# Altium PCB MB1364.PcbDoc (part 1 of 3)
Units mm, origin at the board's own origin, x right, y up, seen from the top; angles counter-clockwise.
Board outline 70 x 133.34 mm, 4 copper layers (Top Layer, Signal Layer 1, Signal Layer 3, Bottom Layer), stack 1.501 mm thick; 93 components, 195 nets, 473 pads, 282 vias.
Unrouted connection lines stored in the file: 23.
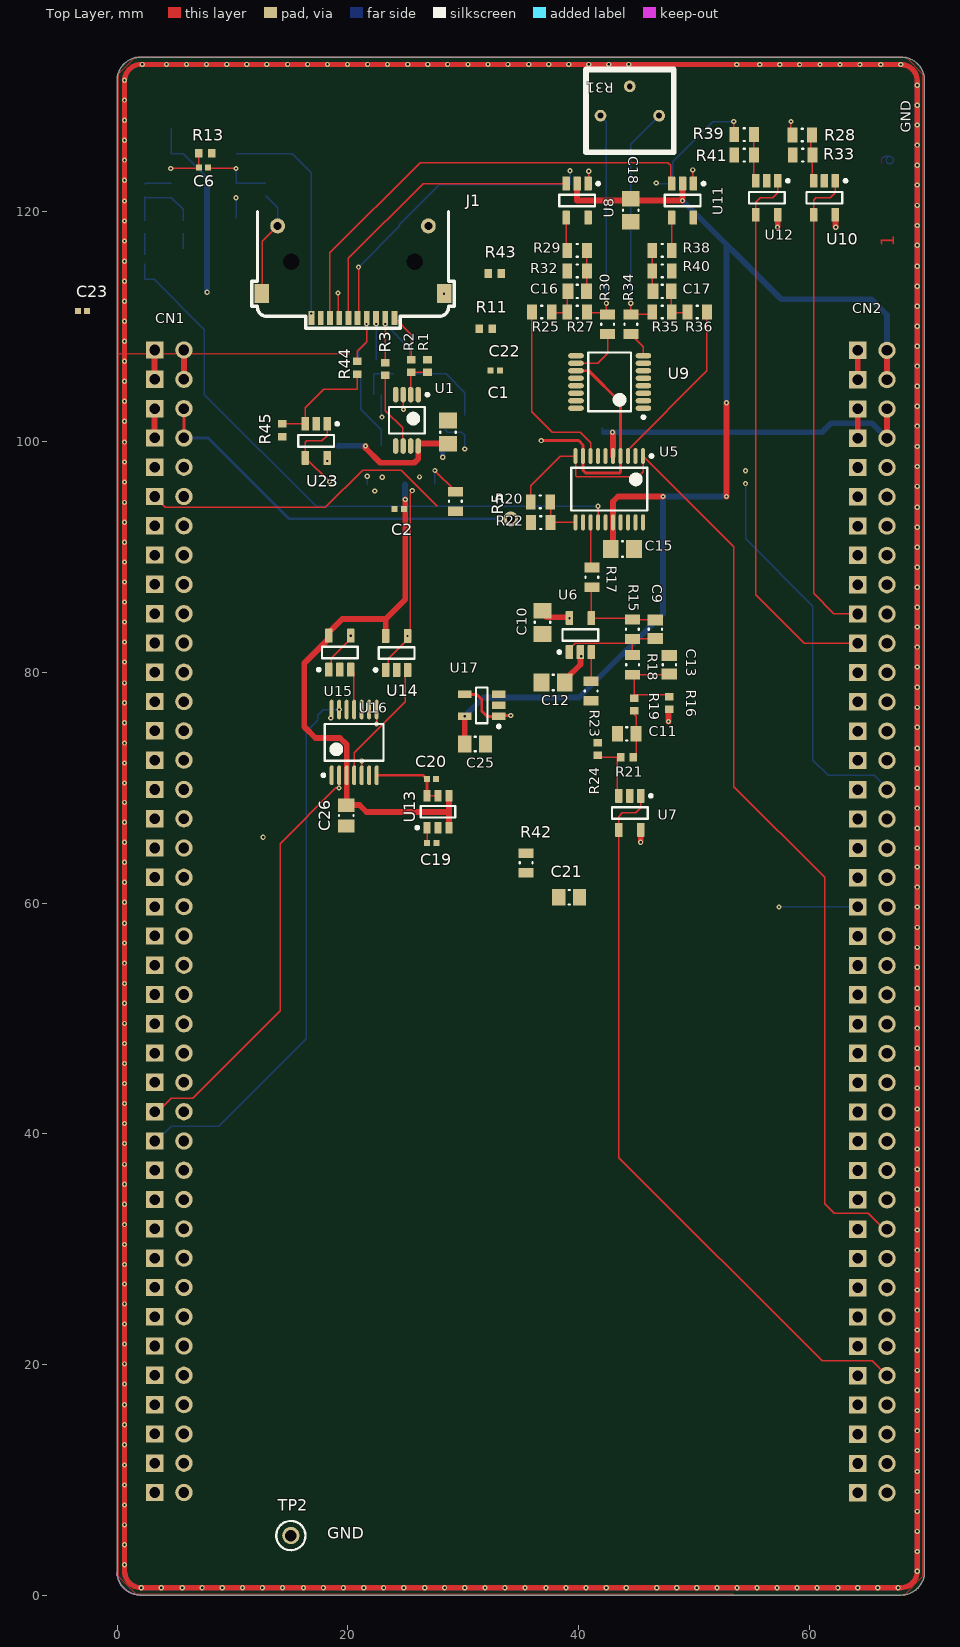
[diagram p0: Top Layer view]
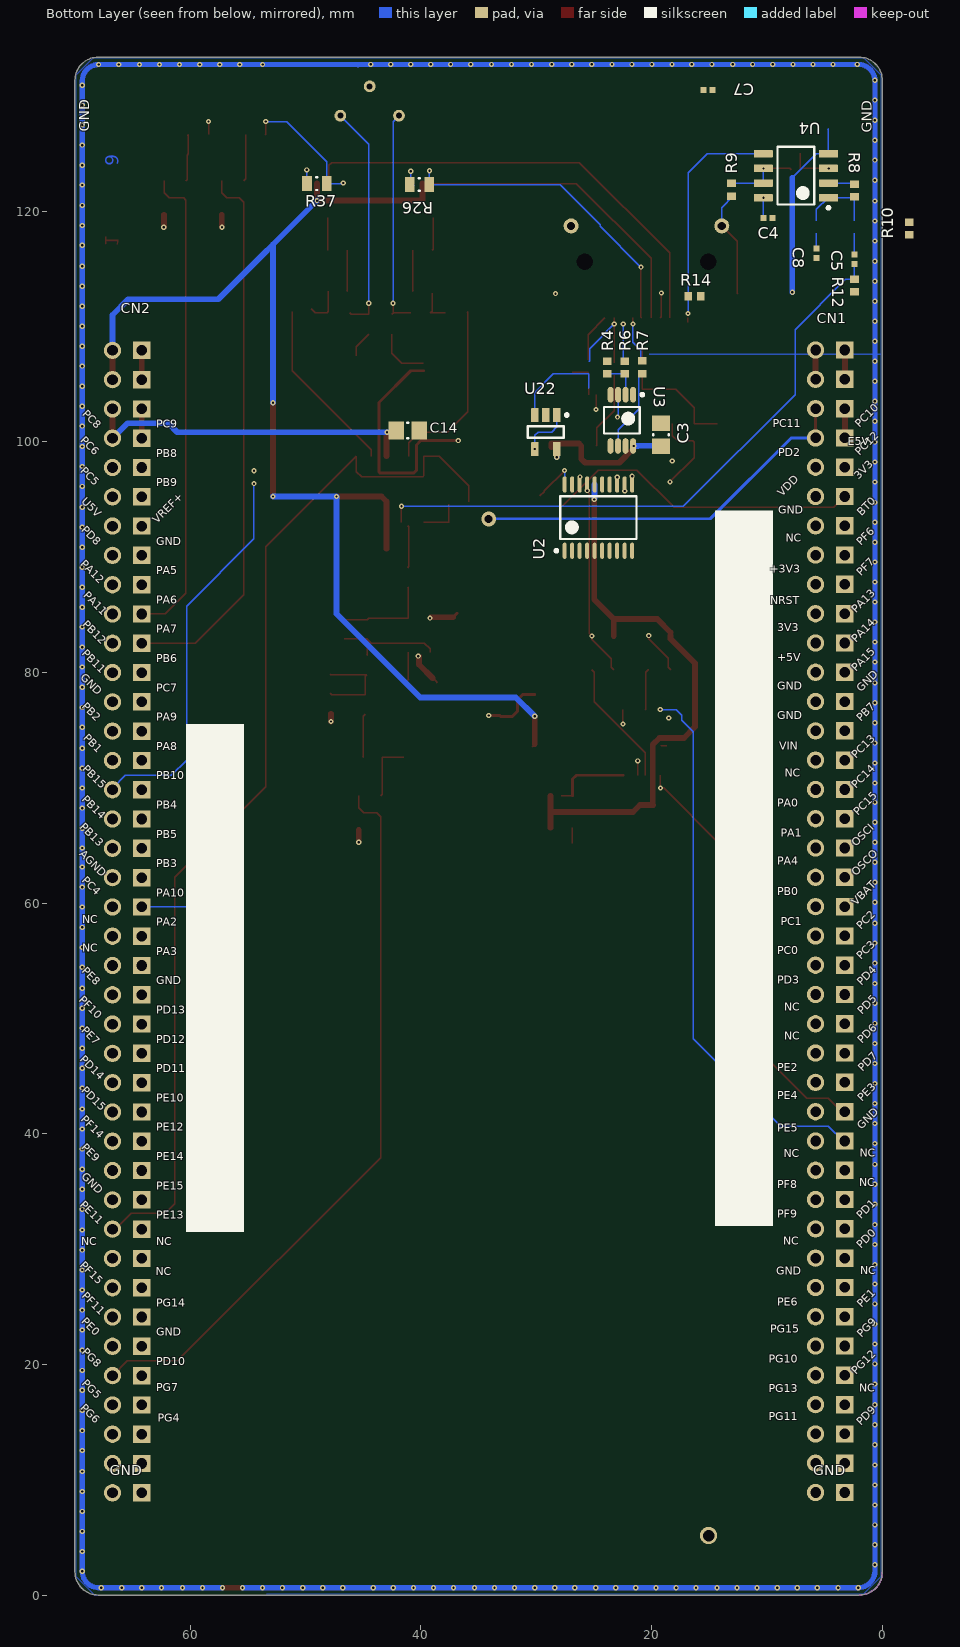
[diagram p1: Bottom Layer view, seen from below]
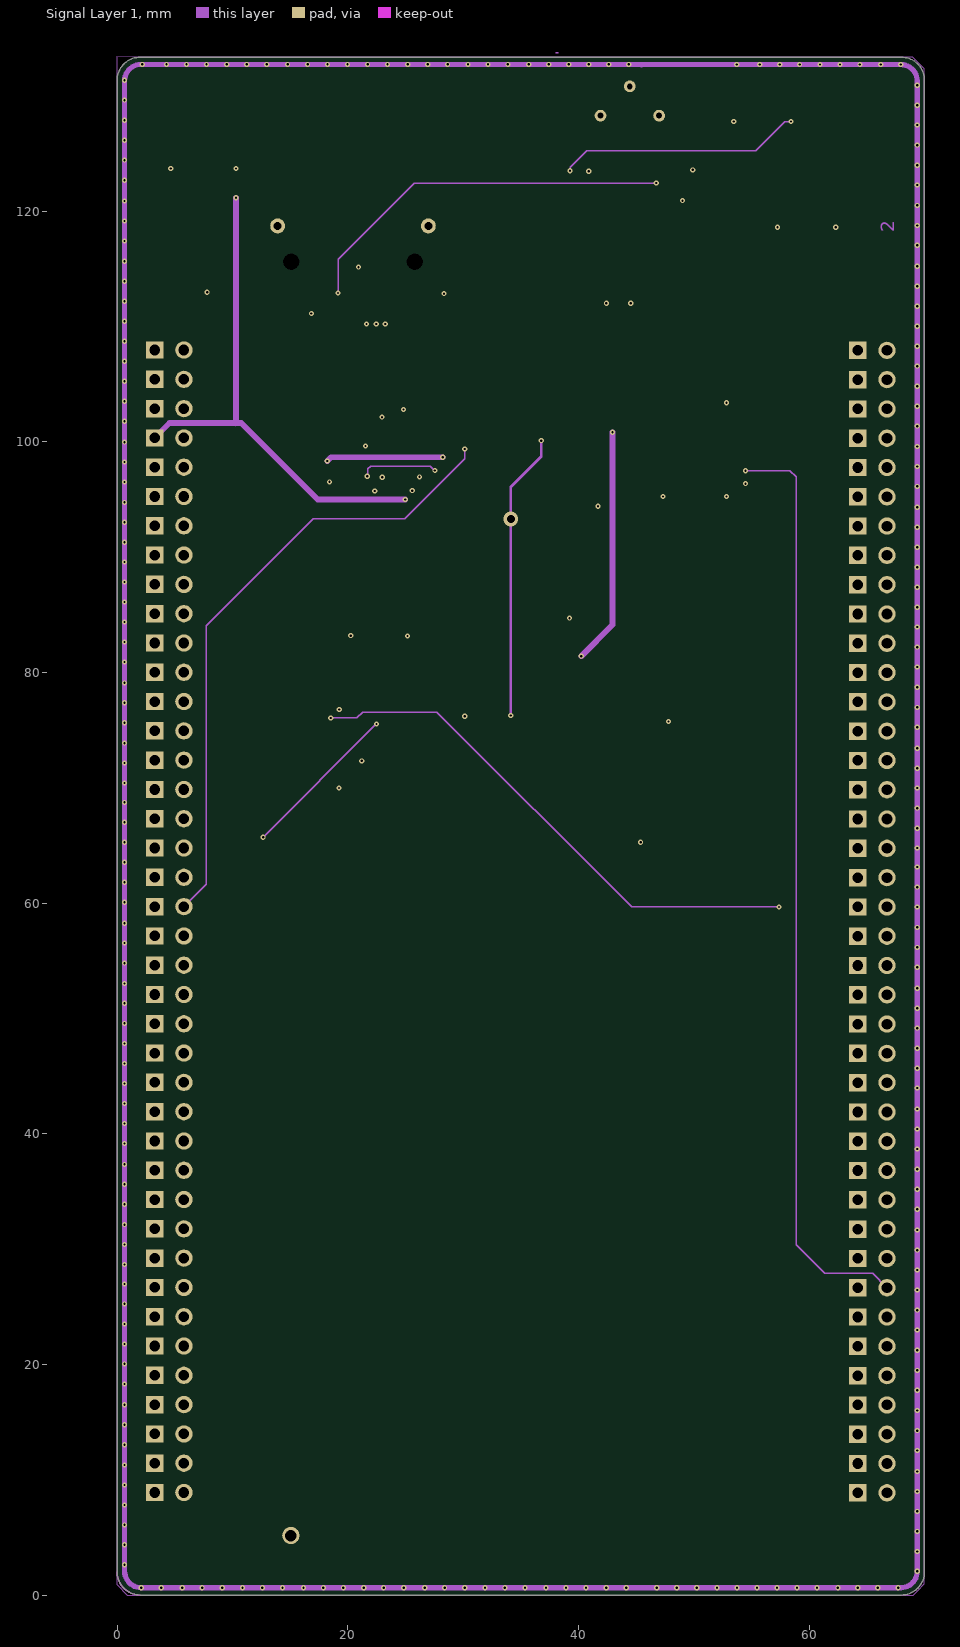
[diagram p2: Signal Layer 1]
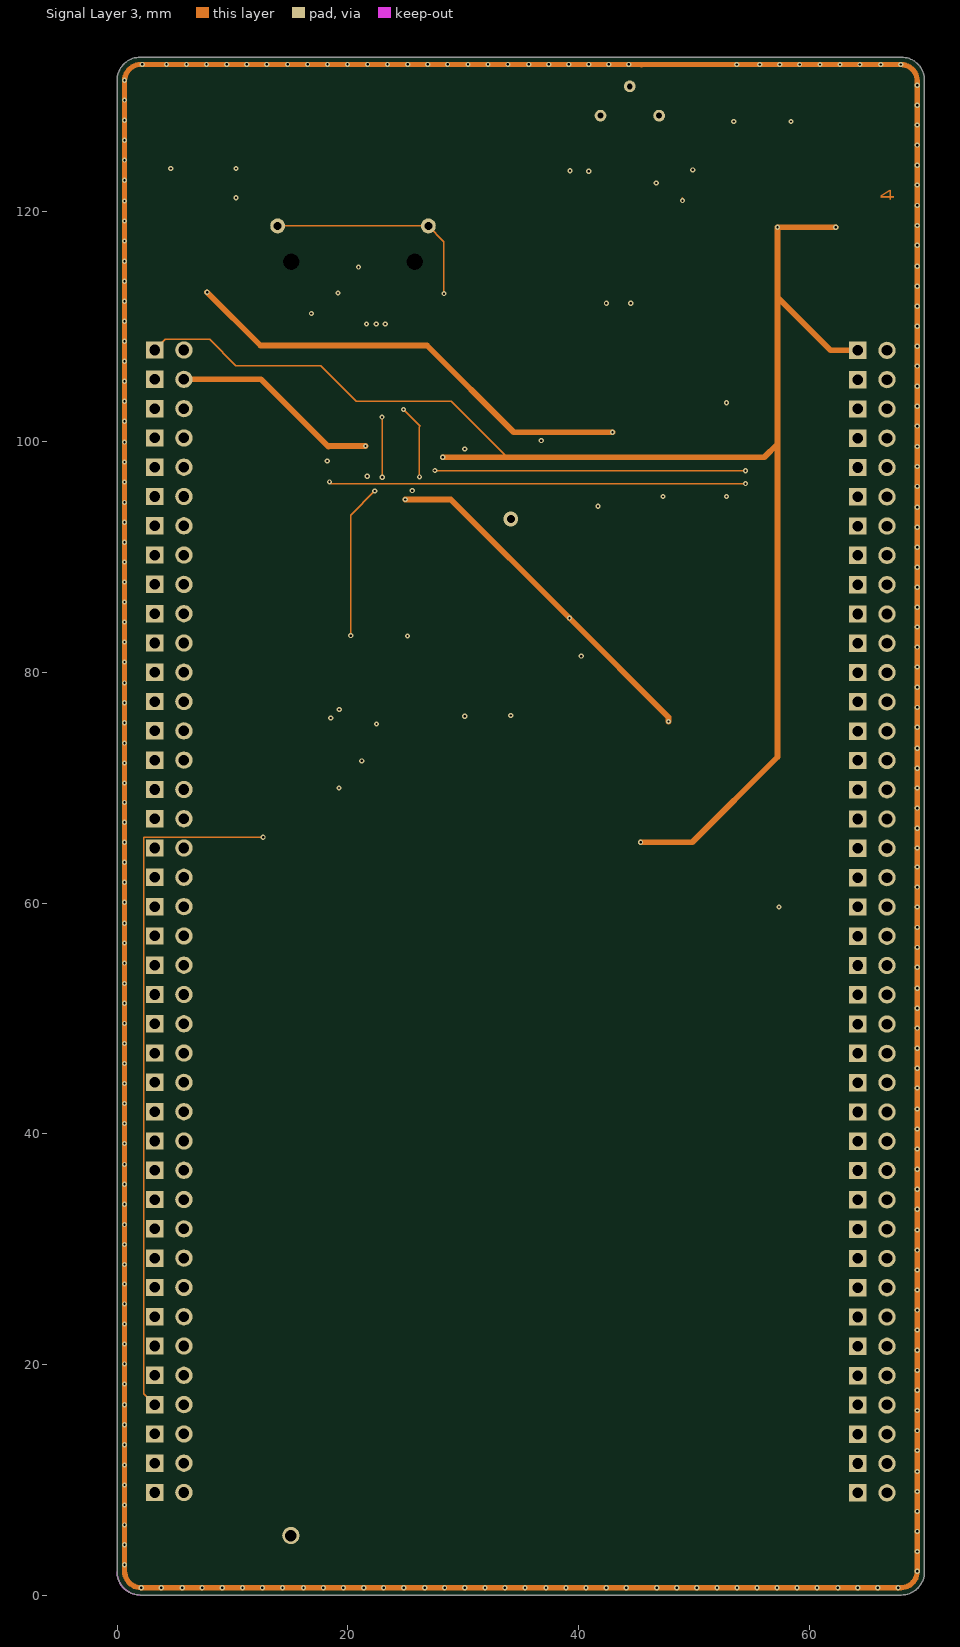
[diagram p3: Signal Layer 3]

## Layer stack, top to bottom
Top Solder: solder mask 0.015, Solder Resist, Dk 3.5
Top Layer: signal copper 0.042
Dielectric 1: prepreg 0.0991, FR-4, Dk 4.2
Signal Layer 1: signal copper 0.0348
Dielectric 2: core 0.1016, Dk 4.2
Dielectric 3: prepreg 0.9457, Dk 4.2
Signal Layer 3: signal copper 0.0348
Dielectric 4: core 0.1016, Dk 4.2
Dielectric 5: prepreg 0.0991, Dk 4.2
Bottom Layer: signal copper 0.042
Bottom Solder: solder mask 0.015, Solder Resist, Dk 3.5

## Board outline
0,2 ccw(c2,2) 2,0 37.369,0 51.369,0 68,0 ccw(c68,2) 70,2 70,131.34 ccw(c68,131.34) 68,133.34 2,133.34 ccw(c2,131.34) 0,131.34

## Design rules (kind name [scope] priority, off if disabled: settings)
BoardOutlineClearance [All] p1: gap=0.4 ignorepadtopadclearanceinfootprint=FALSE
Clearance Clearance_RMII_SINGLE_50R [InNetClass('NC_RMII_SINGLE_50R')] p1: gap=0.12 ignorepadtopadclearanceinfootprint=TRUE except(0.2: Arc-Hole Track-Hole SMDPad-SMDPad SMDPad-THPad SMDPad-Hole THPad-THPad THPad-Hole Via-Via Via-Hole Fill-Hole Poly-Hole Region-Hole Text-Hole; 0.3: Arc-Fill Arc-Poly Track-Track Track-Fill Track-Poly SMDPad-Fill SMDPad-Poly THPad-Fill THPad-Poly Via-Fill Via-Poly Fill-Fill Fill-Poly Poly-Poly)
Clearance Clearance_VCP_ISO300 [InNetClass('NC_VCP_ISO300')] p2: gap=0.12 ignorepadtopadclearanceinfootprint=TRUE except(0.2: Arc-Hole Track-Hole SMDPad-SMDPad SMDPad-THPad SMDPad-Hole THPad-THPad THPad-Hole Via-Via Via-Hole Fill-Hole Poly-Hole Region-Hole Text-Hole; 0.3: Arc-Fill Arc-Poly Track-Track Track-Fill Track-Poly SMDPad-Fill SMDPad-Poly THPad-Fill THPad-Poly Via-Fill Via-Poly Fill-Fill Fill-Poly Poly-Poly)
Clearance Clearance_USB_DIFF_90R [InNetClass('NC_USB_DIFF_90R')] p3: gap=0.12 ignorepadtopadclearanceinfootprint=TRUE except(0.2: Arc-Hole Track-Hole SMDPad-SMDPad SMDPad-THPad SMDPad-Hole THPad-THPad THPad-Hole Via-Via Via-Hole Fill-Hole Poly-Hole Region-Hole Text-Hole; 0.3: Arc-Fill Arc-Poly Track-Fill Track-Poly SMDPad-Fill SMDPad-Poly THPad-Fill THPad-Poly Via-Fill Via-Poly Fill-Fill Fill-Poly Poly-Poly)
Clearance Clearance_USB_DIFF_90R_OPTION [InNetClass('NC_USB_DIFF_90R_OPTION') vs OnLayer('Top Layer')] p4: gap=0.12 ignorepadtopadclearanceinfootprint=TRUE except(0.2: Arc-Hole Track-Hole SMDPad-SMDPad SMDPad-THPad SMDPad-Hole THPad-THPad THPad-Hole Via-Via Via-Hole Fill-Hole Poly-Hole Region-Hole Text-Hole; 0.226: Track-Track; 0.3: Arc-Fill Arc-Poly Track-Fill Track-Poly SMDPad-Fill SMDPad-Poly THPad-Fill THPad-Poly Via-Fill Via-Poly Fill-Fill Fill-Poly Poly-Poly)
Clearance Clearance_USB_DIFF_90R_OPTION_L3 [InNetClass('NC_USB_DIFF_90R_OPTION') vs OnLayer('Signal Layer 2')] p5: gap=0.12 ignorepadtopadclearanceinfootprint=TRUE except(0.17: Track-Track; 0.2: Arc-Hole Track-Hole SMDPad-SMDPad SMDPad-THPad SMDPad-Hole THPad-THPad THPad-Hole Via-Via Via-Hole Fill-Hole Poly-Hole Region-Hole Text-Hole; 0.3: Arc-Fill Arc-Poly Track-Fill Track-Poly SMDPad-Fill SMDPad-Poly THPad-Fill THPad-Poly Via-Fill Via-Poly Fill-Fill Fill-Poly Poly-Poly)
Clearance Clearance_RXTX_DIFF_100R [InNetClass('NC_RXTX_DIFF_100R')] p6: gap=0.12 ignorepadtopadclearanceinfootprint=TRUE except(0.2: Arc-Hole Track-Hole SMDPad-SMDPad SMDPad-THPad SMDPad-Hole THPad-THPad THPad-Hole Via-Via Via-Hole Fill-Hole Poly-Hole Region-Hole Text-Hole; 0.3: Arc-Fill Arc-Poly Track-Fill Track-Poly SMDPad-Fill SMDPad-Poly THPad-Fill THPad-Poly Via-Fill Via-Poly Fill-Fill Fill-Poly Poly-Poly)
Clearance Clearance_STLK_ISO200 [InNetClass('NC_STLK_W200-ISO200')] p7: gap=0.12 ignorepadtopadclearanceinfootprint=TRUE except(0.2: Arc-Poly Arc-Hole Track-Track Track-Poly Track-Hole SMDPad-SMDPad SMDPad-THPad SMDPad-Poly SMDPad-Hole THPad-THPad THPad-Poly THPad-Hole Via-Via Via-Poly Via-Hole Fill-Poly Fill-Hole Poly-Poly Poly-Hole Region-Hole Text-Hole; 0.3: Arc-Fill Track-Fill SMDPad-Fill THPad-Fill Via-Fill Fill-Fill)
Clearance [All] p8: gap=0.12 ignorepadtopadclearanceinfootprint=TRUE except(0.2: Arc-Hole Track-Hole SMDPad-SMDPad SMDPad-THPad SMDPad-Hole THPad-THPad THPad-Hole Via-Via Via-Hole Fill-Hole Poly-Hole Region-Hole Text-Hole; 0.3: Arc-Fill Track-Fill SMDPad-Fill THPad-Fill Via-Fill Fill-Fill)
ComponentClearance [All] p1: gap=0 collisioncheckmode=3 verticalgap=0 showdistances=FALSE
DiffPairsRouting DiffPairsRouting_USB_90R [InDifferentialPairClass('DPC_USB_DIFF_90R')] p1: maxlimit=0.226 minlimit=0.226 mostfreqgap=0.226 toplayer_mingap=0.226 toplayer_minwidth=0.155 toplayer_maxwidth=0.155 toplayer_prefwidth=0.155 midlayer1_mingap=0.226 midlayer1_minwidth=0.155 midlayer1_maxwidth=0.155 midlayer1_prefwidth=0.155 midlayer3_prefgap=0.226 midlayer3_minwidth=0.155 midlayer3_maxwidth=0.155 midlayer3_prefwidth=0.155 bottomlayer_mingap=0.226 bottomlayer_minwidth=0.155 bottomlayer_maxwidth=0.155 bottomlayer_prefwidth=0.155 maxuncoupledlength=12.7
DiffPairsRouting DiffPairsRouting_RXTX_100R [InDifferentialPairClass('DPC_RXTX_DIFF_100R')] p2: maxlimit=0.252 minlimit=0.252 mostfreqgap=0.252 toplayer_minwidth=0.11 toplayer_maxwidth=0.13 toplayer_prefwidth=0.13 midlayer1_minwidth=0.13 midlayer1_maxwidth=0.13 midlayer1_prefwidth=0.13 midlayer3_minwidth=0.13 midlayer3_maxwidth=0.13 midlayer3_prefwidth=0.13 bottomlayer_minwidth=0.11 bottomlayer_maxwidth=0.13 bottomlayer_prefwidth=0.13 maxuncoupledlength=12.7
FabricationTestPointUsage TestPointUsage [All] p1: valid=0 allowmultiple=FALSE
FabricationTestpoint Testpoint [(IsPad And (OnTopLayer Or OnBottomLayer))] p1: side=3 testpointundercomponent=TRUE minsize=1.016 maxsize=2.54 preferedsize=1.524 minholesize=0 maxholesize=1.016 preferedholesize=0.813 testpointgrid=0.025 allowsidetop=TRUE allowsidebottom=TRUE usegrid=TRUE gridtolerance=0
HoleSize [All] p1: absolutevalues=TRUE maxlimit=3.81 minlimit=0.025 maxpercent=80.000 minpercent=20.000
MinimumSolderMaskSliver [All] p1: minsoldermaskwidth=0
PolygonConnect PolygonConnect_10 [All vs IsNamedPolygon('USB_FS_VBUS_L01_P068')] p1: connectstyle=Direct reliefconductorwidth=0.254 reliefentries=4 polygonreliefangle="90 Angle" airgapwidth=0.254
PolygonConnect PolygonConnect_9 [All vs IsNamedPolygon('NONET_L03_P060')] p2: connectstyle=Direct reliefconductorwidth=0.254 reliefentries=4 polygonreliefangle="90 Angle" airgapwidth=0.254
PolygonConnect PolygonConnect_8 [All vs IsNamedPolygon('5V_L01_P058')] p3: connectstyle=Direct reliefconductorwidth=0.254 reliefentries=4 polygonreliefangle="90 Angle" airgapwidth=0.254
PolygonConnect PolygonConnect_7 [All vs IsNamedPolygon('3V3_STLK_L04_P042')] p4: connectstyle=Direct reliefconductorwidth=0.254 reliefentries=4 polygonreliefangle="90 Angle" airgapwidth=0.254
PolygonConnect PolygonConnect_6 [All vs IsNamedPolygon('5V_USB_CHGR_L04_P040')] p5: connectstyle=Direct reliefconductorwidth=0.254 reliefentries=4 polygonreliefangle="90 Angle" airgapwidth=0.254
PolygonConnect PolygonConnect_5 [All vs IsNamedPolygon('NONET_L01_P038')] p6: connectstyle=Direct reliefconductorwidth=0.254 reliefentries=4 polygonreliefangle="90 Angle" airgapwidth=0.254
PolygonConnect PolygonConnect_4 [All vs IsNamedPolygon('NONET_L01_P038')] p7: thpad.connectstyle=Relief thpad.reliefconductorwidth=0.4 thpad.reliefentries=4 thpad.polygonreliefangle="90 Angle" thpad.airgapwidth=0.4 smdpad.connectstyle=Direct smdpad.reliefconductorwidth=0.254 smdpad.reliefentries=4 smdpad.polygonreliefangle="90 Angle" smdpad.airgapwidth=0.254 via.connectstyle=Direct via.reliefconductorwidth=0.254 via.reliefentries=4 via.polygonreliefangle="90 Angle" via.airgapwidth=0.254
PolygonConnect PolygonConnect_3 [All vs IsNamedPolygon('5V_VIN_L01_P028')] p8: connectstyle=Direct reliefconductorwidth=0.254 reliefentries=4 polygonreliefangle="90 Angle" airgapwidth=0.254
PolygonConnect PolygonConnect_2 [All vs IsNamedPolygon('NONET_L01_P026')] p9: connectstyle=Direct reliefconductorwidth=0.254 reliefentries=4 polygonreliefangle="90 Angle" airgapwidth=0.254
PolygonConnect PolygonConnect_1 [All vs IsNamedPolygon('NONET_L01_P024')] p10: connectstyle=Direct reliefconductorwidth=0.254 reliefentries=4 polygonreliefangle="90 Angle" airgapwidth=0.254
PolygonConnect [All] p11: thpad.connectstyle=Relief thpad.reliefconductorwidth=0.3 thpad.reliefentries=4 thpad.polygonreliefangle="90 Angle" thpad.airgapwidth=0.3 smdpad.connectstyle=Relief smdpad.reliefconductorwidth=0.3 smdpad.reliefentries=4 smdpad.polygonreliefangle="90 Angle" smdpad.airgapwidth=0.3 via.connectstyle=Direct via.reliefconductorwidth=0.254 via.reliefentries=4 via.polygonreliefangle="90 Angle" via.airgapwidth=0.254
RoutingLayers RoutingLayers_USB_DIFF_90R [InDifferentialPairClass('DPC_USB_DIFF_90R')] p1: top layer_v5=TRUE mid layer 1_v5=TRUE mid layer 3_v5=TRUE bottom layer_v5=TRUE
RoutingLayers RoutingLayers_RXTX_DIFF_100R [InDifferentialPairClass('DPC_RXTX_DIFF_100R')] p2: top layer_v5=TRUE mid layer 1_v5=TRUE mid layer 3_v5=TRUE bottom layer_v5=TRUE
RoutingLayers RoutingLayers_RMII_SINGLE_50R [InNetClass('NC_RMII_SINGLE_50R')] p3: top layer_v5=TRUE mid layer 1_v5=TRUE mid layer 3_v5=TRUE bottom layer_v5=TRUE
RoutingVias RoutingVias_Default [All] p1: holewidth=0.2 width=0.45 viastyle="Through Hole" minholewidth=0.2 minwidth=0.45 maxholewidth=0.2 maxwidth=0.45
SilkToSilkClearance [All] p1: silktosilkclearance=0.102
SilkToSolderMaskClearance SilkscreenOverComponentPads [IsPad] p1: minsilkscreentomaskgap=0.102 clearancetoexposedcopper=TRUE
SolderMaskExpansion [All] p1: expansion=0.102
Width Width_RMII_SINGLE_50R [InNetClass('NC_RMII_SINGLE_50R')] p1: maxlimit=0.127 minlimit=0.127 preferedwidth=0.127 minimp=50.000000 maximp=50.000000 favimp=50.000000
Width Width_POWER_300u [InNetClass('NC_POWER_300u')] p2: maxlimit=10 minlimit=0.12 preferedwidth=0.3 minimp=50.000000 maximp=50.000000 favimp=50.000000
Width Width_GROUND [InNetClass('NC_GROUND')] p3: maxlimit=10 minlimit=0.12 preferedwidth=0.3 minimp=50.000000 maximp=50.000000 favimp=50.000000
Width Width_POWER_500u [InNetClass('NC_POWER_500u')] p4: maxlimit=10 minlimit=0.12 preferedwidth=0.5 minimp=50.000000 maximp=50.000000 favimp=50.000000
Width Width_POWER_SMPS [InNetClass('NC_POWER_SMPS')] p5: maxlimit=10 minlimit=0.12 preferedwidth=0.5 minimp=50.000000 maximp=50.000000 favimp=50.000000
Width Width_STLK_W200 [InNetClass('NC_STLK_W200-ISO200')] p6: maxlimit=10 minlimit=0.2 preferedwidth=0.2 minimp=50.000000 maximp=50.000000 favimp=50.000000
Width Width_USB_OPTION [InNetClass('NC_USB_DIFF_90R_OPTION')] p7: maxlimit=0.155 minlimit=0.155 preferedwidth=0.155 minimp=50.000000 maximp=50.000000 favimp=50.000000
Width [All] p8: maxlimit=10 minlimit=0.12 preferedwidth=0.12 minimp=50.000000 maximp=50.000000 favimp=50.000000
Width Width_RD_N [InNet('RD_N')] p9: maxlimit=10 minlimit=0.11 preferedwidth=0.12 toplayer_maxwidth=0.11 toplayer_prefwidth=0.11 midlayer1_minwidth=0.12 midlayer3_minwidth=0.12 bottomlayer_maxwidth=0.11 bottomlayer_prefwidth=0.11 minimp=50.000000 maximp=50.000000 favimp=50.000000
Width Width_TD_P [InNet('TD_P')] p10: maxlimit=10 minlimit=0.11 preferedwidth=0.12 toplayer_maxwidth=0.11 toplayer_prefwidth=0.11 midlayer1_minwidth=0.12 midlayer3_minwidth=0.12 bottomlayer_maxwidth=0.11 bottomlayer_prefwidth=0.11 minimp=50.000000 maximp=50.000000 favimp=50.000000
21 further rules are at their usual default settings.

## Classes and differential pairs
component class zp_zh: C19 C20 C21 C25 C26 R42 TP2 U13 U14 U15 U16 U17
component class Feedback: C9 C10 C11 C12 C13 C14 C15 C16 C17 C18 R15 R16 R17 R18 R19 R20 R21 R22 R23 R24 R25 R26 R27 R28 R29 R30 R31 R32 R33 R34 R35 R36 R37 R38 R39 R40 R41 U5 U6 U7 U8 U9 U10 U11 U12
component class CT: C1 C2 C3 C4 C5 C6 C7 C8 C22 C23 J1 R1 R2 R3 R4 R5 R6 R7 R8 R9 R10 R11 R12 R13 R14 R43 R44 R45 U1 U2 U3 U4 U22 U23
component class Connectors: CN1 CN2 HW1 HW2

## Components (designator, comment, footprint, x,y, rotation, side; value= is the part's Value field where it differs from the comment)
C1 ".1uF" CAPC0805(2012)75_M 28.681,100.838 r90 top
C2 "0.1uF" CAPC0402(1005)60_L 24.46,94.158 r0 top
C3 ".1uF" CAPC0805(2012)75_M 19.181,100.609 r90 bottom
C4 "0.1uF" CAPC0402(1005)60_L 9.906,119.38 r0 bottom
C5 "0.1uF" CAPC0402(1005)60_L 2.413,115.824 r270 bottom
C6 "0.1uF" CAPC0402(1005)60_L 7.493,123.774 r180 top
C7 "0.1uF" CAPC0402(1005)60_L 15.113,130.505 r0 bottom
C8 "1uF" CAPC0402(1005)60_L 5.715,116.332 r90 bottom
C9 "470nF" CAPC0805(2012)75_L 46.665,83.731 r270 top value=.47uF
C10 ".1uF" CAPC0805(2012)75_M 36.881,84.328 r270 top
C11 "22uF" CAPC0805(2012)75_L 44.196,74.676 r0 top
C12 ".1uF" CAPC0805(2012)75_M 37.795,79.121 r180 top
C13 "22uF" CAPC0805(2012)75_L 47.879,80.645 r270 top
C14 ".1uF" CAPC0805(2012)75_M 41.148,100.965 r180 bottom
C15 ".1uF" CAPC0805(2012)75_M 43.815,90.703 r180 top
C16 "CAP CER 1UF 25V X7R 0805" CAPC0805(2012)155_L 39.878,113.03 r180 top
C17 "CAP CER 1UF 25V X7R 0805" CAPC0805(2012)155_L 47.244,113.03 r0 top
C18 ".1uF" CAPC0805(2012)75_M 44.534,120.066 r90 top
C19 "0.1uF" CAPC0402(1005)60_L 27.28,65.205 r0 top
C20 "0.1uF" CAPC0402(1005)60_L 27.254,70.742 r180 top
C21 "CAP CER 10UF 25V X7R 0805" CAPC0805(2012)145_N 39.192,60.503 r0 top
C22 "0.1uF" CAPC0402(1005)60_L 32.791,106.172 r0 top
C23 "0.1uF" CAPC0402(1005)60_L -2.997,111.354 r0 top
C25 "CAP CER 0.1UF 25V X7R 0805" CAPC0805(2012)145_N 31.031,73.788 r180 top
C26 "CAP CER 0.1UF 25V X7R 0805" CAPC0805(2012)145_N 19.863,67.589 r90 top
CN1 "SSW-140-23-G-D" SSW-140-23-G-D 4.516,58.419 r270 top locked
CN2 "SSW-140-23-G-D" SSW-140-23-G-D 65.476,58.394 r270 top locked
J1 "FCS8-10-01-X-S-A" FCS8-10-01-X-S-A 20.449,120.443 r180 top locked
R1 "10k" RESC0402(1005)_M 26.903,106.553 r270 top
R2 "100k" RESC0402(1005)_M 25.506,106.553 r90 top
R3 "100" RESC0402(1005)_M 23.255,106.299 r90 top
R4 "10k" RESC0402(1005)_M 23.855,106.426 r270 bottom
R5 "4.75K" RESC0805(2012)_L 29.316,94.818 r270 top value=47k
R6 "100k" RESC0402(1005)_M 22.331,106.426 r90 bottom
R7 "100" RESC0402(1005)_M 20.807,106.451 r90 bottom
R8 "301k" RESC0402(1005)_M 2.413,121.793 r90 bottom
R9 "100" RESC0402(1005)_M 13.081,121.844 r90 bottom
R10 "10k" RESC0402(1005)_M -2.337,118.491 r90 bottom
R11 "100k" RESC0402(1005)_M 31.953,109.804 r0 top
R12 "47.5k" RESC0402(1005)_M 2.413,113.538 r270 bottom
R13 "475k" RESC0402(1005)_M 7.645,125.019 r0 top
R14 "2.2M" RESC0402(1005)_M 16.281,112.624 r0 bottom
R15 "300k" RESC0805(2012)_L 44.665,83.731 r90 top
R16 "100k" RESC0402(1005)_M 47.879,77.343 r270 top
R17 "18.2k" RESC0805(2012)_L 41.165,88.231 r90 top
R18 "511k" RESC0805(2012)_L 44.704,80.645 r90 top
R19 "100k" RESC0402(1005)_M 44.831,77.216 r90 top
R20 "0" RESC0805(2012)_L 36.703,94.793 r0 top
R21 "100k" RESC0402(1005)_M 44.196,72.644 r0 top
R22 "DNP" RESC0805(2012)_L 36.728,92.989 r0 top value=0
R23 "33k" RESC0805(2012)_L 41.097,78.384 r90 top
R24 "100k" RESC0402(1005)_M 41.656,73.355 r270 top
R25 "3.9k" RESC0805(2012)_L 36.83,111.252 r180 top
R26 "100" RESC0805(2012)_L 40.132,122.301 r0 bottom value=0
R27 "7.5k" RESC0805(2012)_L 39.878,111.252 r180 top
R28 "100k" RESC0805(2012)_L 59.411,126.594 r180 top
R29 "0" RESC0805(2012)_L 39.878,116.586 r0 top
R30 "DNP" RESC0805(2012)_L 42.534,110.181 r270 top value=0
R31 "TRIMMER 5K OHM 0.25W PC PIN" "Trimmer 2.54" 41.91,128.27 r0 top
R32 "1M" RESC0805(2012)_L 39.878,114.808 r0 top
R33 "100k" RESC0805(2012)_L 59.436,124.841 r0 top
R34 "DNP" RESC0805(2012)_L 44.534,110.181 r270 top value=0
R35 "7.5k" RESC0805(2012)_L 47.244,111.252 r180 top
R36 "3.9k" RESC0805(2012)_L 50.292,111.252 r180 top
R37 "100" RESC0805(2012)_L 49.022,122.379 r0 bottom value=0
R38 "0" RESC0805(2012)_L 47.244,116.586 r180 top
R39 "100k" RESC0805(2012)_L 54.356,126.619 r180 top
R40 "1M" RESC0805(2012)_L 47.244,114.808 r180 top
R41 "100k" RESC0805(2012)_L 54.356,124.841 r0 top
R42 "10k" RESC0805(2012)_L 35.458,63.475 r90 top
R43 "10k" RESC0402(1005)_M 32.741,114.579 r0 top
R44 "100k" RESC0402(1005)_M 20.807,106.421 r90 top
R45 "10k" RESC0402(1005)_M 14.3,100.99 r90 top
TP2 "5003" KSTN-5003 15.062,5.156 r90 top
U1 "LTC2057HV 60V" LT6016 25.125,101.854 r270 top
U2 "MAX333CWP+" TSOP65P640X90-20N 24.617,93.421 r90 bottom
U3 "LTC2057HV 60V" LT6016 22.585,101.854 r270 bottom
U4 "LMC662CM" D0008A_M 7.493,123.063 r0 bottom
U5 "MAX333CWP+" TSOP65P640X90-20N 42.672,95.885 r270 top
U6 "OPA188AIDBVR" DBV0005A_M 40.165,83.231 r90 top
U7 "OPA188AIDBVR" DBV0005A_M 44.45,67.818 r270 top
U8 "OPA188AIDBVR" DBV0005A_M 39.878,120.904 r270 top
U9 "AD5231BRUZ10" AD5231BRUZ10 42.709,105.181 r180 top
U10 "OPA188AIDBVR" DBV0005A_M 61.329,121.149 r270 top
U11 "OPA188AIDBVR" DBV0005A_M 49.022,120.904 r270 top
U12 "OPA188AIDBVR" DBV0005A_M 56.329,121.149 r270 top
U13 "MAX6070AAUT41+T" SOT95P280X445-6N 27.818,67.912 r90 top
U14 "OPA188AIDBVR" DBV0005A_M 24.232,81.686 r90 top
U15 "OPA188AIDBVR" DBV0005A_M 19.304,81.712 r90 top
U16 "AD5666BRUZ-2" RU-14_N 20.549,73.928 r90 top
U17 "OPA188AIDBVR" DBV0005A_M 31.615,77.14 r180 top
U22 "OPA188AIDBVR" DBV0005A_M 29.181,100.838 r270 bottom
U23 "OPA188AIDBVR" DBV0005A_M 17.251,100.076 r270 top

## Footprints (in the part's own frame and the unit in brackets; to place one, negate y for a bottom-side part, rotate by r counter-clockwise, add the part's x,y. Pads: shape width x height; smd on the part's side, far side on the other; paste and mask are expansions set on the pad)
AD5231BRUZ10 [mm]
  oval 1.35x0.45 smd: 1(-2.925,2.275) 2(-2.925,1.625) 3(-2.925,0.975) 4(-2.925,0.325) 5(-2.925,-0.325) 6(-2.925,-0.975) 7(-2.925,-1.625) 8(-2.925,-2.275) 9(2.925,-2.275) 10(2.925,-1.625) 11(2.925,-0.975) 12(2.925,-0.325) 13(2.925,0.325) 14(2.925,0.975) 15(2.925,1.625) 16(2.925,2.275)
  silkscreen extent -3.05,-2.55 1.85,3.17, body extent -3.15,-2.55 3.15,2.55, height 1.2
CAPC0402(1005)60_L [mm] "Chip Capacitor, Body 1.0x0.5mm, Height 0.6mm, IPC High Density"
  rect 0.52x0.52 smd: 1(-0.4,0) 2(0.4,0)
  body extent -0.55,-0.3 0.55,0.3, height 0.6
CAPC0805(2012)75_L [mm] "Chip Capacitor, Body 2.0x1.2mm, Height 0.75mm, IPC High Density"
  rect 0.95x1.35 smd: 1(-0.8,0) 2(0.8,0)
  silkscreen extent -0.05,-0.57 0.05,0.58, body extent -1.1,-0.72 1.1,0.72, height 0.75
CAPC0805(2012)75_M [mm] "Chip Capacitor, Body 2.0x1.2mm, Height 0.75mm, IPC Low Density"
  rect 1.35x1.55 smd: 1(-1,0) 2(1,0)
  silkscreen extent -0.05,-0.67 0.05,0.68, body extent -1.1,-0.72 1.1,0.72, height 0.75
CAPC0805(2012)145_N [mm] "Chip Capacitor, Body 2.0x1.2mm, Height 1.45mm, IPC Medium Density"
  rect 1.15x1.45 smd: 1(-0.9,0) 2(0.9,0)
  silkscreen extent -0.05,-0.62 0.05,0.62, body extent -1.1,-0.72 1.1,0.73, height 1.45
CAPC0805(2012)155_L [mm] "Chip Capacitor, Body 2.0x1.2mm, Height 1.55mm, IPC High Density"
  rect 0.95x1.35 smd: 1(-0.8,0) 2(0.8,0)
  silkscreen extent -0.05,-0.58 0.05,0.58, body extent -1.1,-0.72 1.1,0.72, height 1.55
D0008A_M [mm] "SOIC, 8-Leads, Body 5x4mm, Pitch 1.27mm, IPC Low Density"
  rrect15% 1.65x0.65 smd: 1(-2.825,1.905) 2(-2.825,0.635) 3(-2.825,-0.635) 4(-2.825,-1.905) 5(2.825,-1.905) 6(2.825,-0.635) 7(2.825,0.635) 8(2.825,1.905)
  silkscreen extent -2.95,-2.5 1.6,2.9, body extent -3,-2.45 3,2.45, height 1.63
DBV0005A_M [mm] "SOT23, 5-Leads, Body 3.05x1.75mm, Pitch 0.95mm, IPC Low Density"
  rrect15% 1.2x0.65 smd: 1(-1.475,0.95) 2(-1.475,0) 3(-1.475,-0.95) 4(1.475,-0.95) 5(1.475,0.95)
  silkscreen extent -1.6,-1.55 0.5,1.95, body extent -1.42,-1.46 1.42,1.46, height 1.08
FCS8-10-01-X-S-A [mm]
  rect 0.5x1.25 smd mask+0.05: 1(-3.6,9.715) 2(-2.8,9.715) 3(-2,9.715) 4(-1.2,9.715) 5(-0.4,9.715) 6(0.4,9.715) 7(1.2,9.715) 8(2,9.715) 9(2.8,9.715) 10(3.6,9.715)
  rect 1.25x1.65 smd mask+0.05: 11(-7.905,7.605) 12(7.905,7.605)
  round 1.3 hole 0.7 mask+0.075: 13(-6.53,1.73) 14(6.53,1.73)
  round 0 hole 1.45 unplated: 15(-5.35,4.83) 16(5.35,4.83)
  silkscreen extent -8.78,0.5 8.78,10.59, body extent -8.29,1.27 8.3,9.91, height 4.95
KSTN-5003 [mm] "Test Point, Through Hole, Dia 2.54mm"
  round 1.5 hole 1: 1(0,0)
  silkscreen extent -1.27,-1.27 1.27,1.27, body extent -1.27,-1.27 1.27,1.27, height 4.57
LT6016 [mm]
  oval 1.35x0.5 smd: 1(-2.225,0.975) 2(-2.225,0.325) 3(-2.225,-0.325) 4(-2.225,-0.975) 5(2.225,-0.975) 6(2.225,-0.325) 7(2.225,0.325) 8(2.225,0.975)
  silkscreen extent -2.35,-1.55 1.15,1.9, body extent -2.45,-1.55 2.45,1.55, height 1.1
RESC0402(1005)_M [mm] "Chip Resistor, Body 1.0x0.5mm, IPC Low Density"
  rect 0.65x0.75 smd: 1(-0.55,0) 2(0.55,0)
  body extent -0.52,-0.28 0.53,0.28, height 0.4
RESC0805(2012)_L [mm] "Chip Resistor, Body 2.0x1.3mm, IPC High Density"
  rect 0.85x1.3 smd: 1(-0.85,0) 2(0.85,0)
  silkscreen extent -0.05,-0.55 0.05,0.55, body extent -1.1,-0.67 1.1,0.68, height 0.7
RU-14_N [mm] "TSOP, 14-Leads, Body 5x4.4mm, Pitch 0.65mm, IPC Medium Density"
  oval 1.7x0.35 smd: 1(-2.85,1.95) 2(-2.85,1.3) 3(-2.85,0.65) 4(-2.85,0) 5(-2.85,-0.65) 6(-2.85,-1.3) 7(-2.85,-1.95) 8(2.85,-1.95) 9(2.85,-1.3) 10(2.85,-0.65) 11(2.85,0) 12(2.85,0.65) 13(2.85,1.3) 14(2.85,1.95)
  silkscreen extent -2.97,-2.55 1.6,2.8, body extent -2.25,-2.55 2.25,2.55, height 1.2
SOT95P280X445-6N [mm] "SOT23, 6-Leads, Body 2.90x2.80mm, Pitch 0.95mm, IPC Medium Density"
  rect 1x0.6 smd: 1(-1.375,0.95) 2(-1.375,0) 3(-1.375,-0.95) 4(1.375,-0.95) 5(1.375,0) 6(1.375,0.95)
  silkscreen extent -1.5,-1.5 0.5,1.92, body extent -2.11,-1.78 2.11,1.73, height 1.08
SSW-140-23-G-D [mm]
  rect 1.5x1.5 hole 0.92: 1(-49.53,-1.27) 3(-46.99,-1.27) 5(-44.45,-1.27) 7(-41.91,-1.27) 9(-39.37,-1.27) 11(-36.83,-1.27) 13(-34.29,-1.27) 15(-31.75,-1.27) 17(-29.21,-1.27) 19(-26.67,-1.27) 21(-24.13,-1.27) 23(-21.59,-1.27) 25(-19.05,-1.27) 27(-16.51,-1.27) 29(-13.97,-1.27) 31(-11.43,-1.27) 33(-8.89,-1.27) 35(-6.35,-1.27) 37(-3.81,-1.27) 39(-1.27,-1.27) 41(1.27,-1.27) 43(3.81,-1.27) 45(6.35,-1.27) 47(8.89,-1.27) 49(11.43,-1.27) 51(13.97,-1.27) 53(16.51,-1.27) 55(19.05,-1.27) 57(21.59,-1.27) 59(24.13,-1.27) 61(26.67,-1.27) 63(29.21,-1.27) 65(31.75,-1.27) 67(34.29,-1.27) 69(36.83,-1.27) 71(39.37,-1.27) 73(41.91,-1.27) 75(44.45,-1.27) 77(46.99,-1.27) 79(49.53,-1.27)
  round 1.5 hole 0.92: 2(-49.53,1.27) 4(-46.99,1.27) 6(-44.45,1.27) 8(-41.91,1.27) 10(-39.37,1.27) 12(-36.83,1.27) 14(-34.29,1.27) 16(-31.75,1.27) 18(-29.21,1.27) 20(-26.67,1.27) 22(-24.13,1.27) 24(-21.59,1.27) 26(-19.05,1.27) 28(-16.51,1.27) 30(-13.97,1.27) 32(-11.43,1.27) 34(-8.89,1.27) 36(-6.35,1.27) 38(-3.81,1.27) 40(-1.27,1.27) 42(1.27,1.27) 44(3.81,1.27) 46(6.35,1.27) 48(8.89,1.27) 50(11.43,1.27) 52(13.97,1.27) 54(16.51,1.27) 56(19.05,1.27) 58(21.59,1.27) 60(24.13,1.27) 62(26.67,1.27) 64(29.21,1.27) 66(31.75,1.27) 68(34.29,1.27) 70(36.83,1.27) 72(39.37,1.27) 74(41.91,1.27) 76(44.45,1.27) 78(46.99,1.27) 80(49.53,1.27)
  body extent -51.05,-2.48 51.05,2.48, height 8.51
"Trimmer 2.54" [mil]
  round 40 hole 20: 1(0,0) 2(100,100) 3(200,0)
  silkscreen extent -50,-125 250,158, body extent -60,-126 260,200, height 175
TSOP65P640X90-20N [mm] "TSOP, 20-Leads, Body 6.50x4.40mm, Pitch 0.65mm, IPC Medium Density"
  oval 1.4x0.35 smd: 1(-2.875,2.925) 2(-2.875,2.275) 3(-2.875,1.625) 4(-2.875,0.975) 5(-2.875,0.325) 6(-2.875,-0.325) 7(-2.875,-0.975) 8(-2.875,-1.625) 9(-2.875,-2.275) 10(-2.875,-2.925) 11(2.875,-2.925) 12(2.875,-2.275) 13(2.875,-1.625) 14(2.875,-0.975) 15(2.875,-0.325) 16(2.875,0.325) 17(2.875,0.975) 18(2.875,1.625) 19(2.875,2.275) 20(2.875,2.925)
  silkscreen extent -3,-3.3 1.85,3.78, body extent -2.25,-3.3 2.25,3.3, height 0.9

## Part data
C1 C3 C10 C12 C14 C15: library part CMP-1036-01414-1, "CAP 0.1F 100V X7R ±10% 0805 (2012 Metric) Thickness 0.75mm SMD", Capacitance=100nF, Case/Package=0805, Case Code (Metric)=2012, Dielectric=X7R, Dielectric Material=Ceramic, Manufacturer=KEMET, Manufacturer Part Number=C0805C104K1RACTU, Max Operating Temperature=125°C, Min Operating Temperature=-55°C, Package Quantity=1, Supplier Part Number 1=399-3486-1-ND, Tolerance=10%, Voltage=100V, Case Code (Imperial)=0805, ComponentLink1Description=https://datasheet.ciiva.com/7842/1776102-7842535.pdf?src-supplier=Element14, ComponentLink1URL=https://datasheet.ciiva.com/7842/1776102-7842535.pdf?src-supplier=Element14, ComponentLink2Description=https://datasheet.ciiva.com/18219/getdatasheetpartid-295573-18219253.pdf?src-supplier=Verical, ComponentLink2URL=https://datasheet.ciiva.com/18219/getdatasheetpartid-295573-18219253.pdf?src-supplier=Verical, ComponentLink3Description=https://datasheet.ciiva.com/14589/70095383-14589479.pdf?src-supplier=Allied+Electronics, ComponentLink3URL=https://datasheet.ciiva.com/14589/70095383-14589479.pdf?src-supplier=Allied+Electronics, ComponentLink4Description=https://datasheet.ciiva.com/5411/kem-c1002-x7r-smd-5411498.pdf?src-supplier=Mouser, ComponentLink4URL=https://datasheet.ciiva.com/5411/kem-c1002-x7r-smd-5411498.pdf?src-supplier=Mouser, ComponentLink5Description=https://datasheet.ciiva.com/18193/getdatasheetpartid-134794-18193404.pdf?src-supplier=Verical, ComponentLink5URL=https://datasheet.ciiva.com/18193/getdatasheetpartid-134794-18193404.pdf?src-supplier=Verical, Contact Plating=Tin,Matte, Depth=1.25mm, Dissipation Factor=2.5%, Height=1mm, Lead Pitch=0.75mm, Length=2mm, Mount="Surface Mount,PCB", Number of Pins=2, Packaging="Tape and Reel", Pricing 1="1=0.32000, 10=0.21800, 100=0.12340, 500=0.08712, 1000=0.07623 (USD)", Radiation Hardening=No, REACH SVHC="No SVHC", RoHS=Yes, Stock 1=1111347, Supplier 1=Digi-Key, Termination=SMD/SMT, Thickness=0.043inch, Voltage Rating=100V, Voltage Rating (DC)=100V, Width=1.2mm
C2 C4 C5 C6 C7 C8 C19 C20 C22 C23: library part CMP-1034-00252-1, "CAP CER 0.1UF 10V X7R 0402", Manufacturer="Murata Electronics North America", Manufacturer Part Number=GRM155R71A104KA01D, Operating Temperature="-55°C ~ 125°C", Package / Case="0402 (1005 Metric)", Ratings=-, Supplier Part Number 1=490-6321-1-ND, Temperature Coefficient=X7R, Tolerance=±10%, Voltage - Rated=10V, Applications="General Purpose", Category=Capacitors, ComponentLink1Description=http://www.murata.com/~/media/webrenewal/support/library/catalog/products/capacitor/mlcc/c02e.ashx?la=en-us, ComponentLink1URL=http://www.murata.com/~/media/webrenewal/support/library/catalog/products/capacitor/mlcc/c02e.ashx?la=en-us, Features=-, Height - Seated (Max)=-, Lead Spacing=-, Mounting Type="Surface Mount, MLCC", Packaging="Cut Tape (CT)", Part Status=Active, Pricing 1="1=0.1, 10=0.014, 100=0.0063, 500=0.00446, 1000=0.00351, 2500=0.00319, 5000=0.00293 (USD)", RoHS="RoHS Compliant", Size / Dimension="0.039\" L x 0.020\" W (1.00mm x 0.50mm)", Stock 1=2920395, Supplier 1=Digi-Key, Thickness (Max)="0.022\" (0.55mm)"
C9 C11 C13: library part CMP-1036-02117-1, "CAP 150pF 16V ±10% 0805 (2012 Metric) Thickness 0.75mm SMD", Case-EIA=0805, Case-Metric=2012, Rated Voltage="16 V", Tolerance=±10%, Max Thickness="0.75 mm", Technology=SMT
C16 C17: library part CMP-1036-04882-1, Capacitance=1µF, Manufacturer="Murata Electronics North America", Manufacturer Part Number=GRM21BR71E105KA99L, Operating Temperature="-55°C ~ 125°C", Package / Case="0805 (2012 Metric)", Ratings=-, Supplier Part Number 1=490-6484-6-ND, Temperature Coefficient=X7R, Tolerance=±10%, Voltage - Rated=25V, Applications="General Purpose", Category=Capacitors, ComponentLink1Description=http://www.murata.com/~/media/webrenewal/support/library/catalog/products/capacitor/mlcc/c02e.ashx, ComponentLink1URL=http://www.murata.com/~/media/webrenewal/support/library/catalog/products/capacitor/mlcc/c02e.ashx, Features=-, Height - Seated (Max)=-, Lead Spacing=-, Lead Style=-, Mounting Type="Surface Mount, MLCC", Packaging=Digi-Reel®, Part Status=Active, Pricing 1="1=0.14, 10=0.099, 100=0.0468, 500=0.0328, 1000=0.02715 (USD)", RoHS="RoHS Compliant", Size / Dimension="0.079\" L x 0.049\" W (2.00mm x 1.25mm)", Stock 1=295074, Supplier 1=Digi-Key, Thickness (Max)="0.053\" (1.35mm)"
C18: library part CMP-1036-01414-1, "CAP 33pF 25V ±2% 0805 (2012 Metric) Thickness 0.75mm SMD", Case-EIA=0805, Case-Metric=2012, Rated Voltage="25 V", Tolerance=±2%, Max Thickness="0.75 mm", Technology=SMT
C21: library part CMP-1036-04795-1, Capacitance=10µF, Manufacturer="Murata Electronics North America", Manufacturer Part Number=GRM21BR71E104KA01L, Operating Temperature="-55°C ~ 125°C", Package / Case="0805 (2012 Metric)", Ratings=-, Supplier Part Number 1=490-1673-6-ND, Temperature Coefficient=X7R, Tolerance=±10%, Voltage - Rated=25V, Applications="General Purpose", Category=Capacitors, ComponentLink1Description=http://www.murata.com/~/media/webrenewal/support/library/catalog/products/capacitor/mlcc/c02e.ashx, ComponentLink1URL=http://www.murata.com/~/media/webrenewal/support/library/catalog/products/capacitor/mlcc/c02e.ashx, Features=-, Height - Seated (Max)=-, Lead Spacing=-, Lead Style=-, Mounting Type="Surface Mount, MLCC", Packaging=Digi-Reel®, Part Status=Active, Pricing 1="1=0.2, 10=0.145, 100=0.0683, 500=0.04788, 1000=0.03964 (USD)", RoHS="RoHS Compliant", Size / Dimension="0.079\" L x 0.049\" W (2.00mm x 1.25mm)", Stock 1=891652, Supplier 1=Digi-Key, Thickness (Max)="0.053\" (1.35mm)"
C25 C26: library part CMP-1036-04795-1, Capacitance=0.1µF, Manufacturer="Murata Electronics North America", Manufacturer Part Number=GRM21BR71E104KA01L, Operating Temperature="-55°C ~ 125°C", Package / Case="0805 (2012 Metric)", Ratings=-, Supplier Part Number 1=490-1673-6-ND, Temperature Coefficient=X7R, Tolerance=±10%, Voltage - Rated=25V, Applications="General Purpose", Category=Capacitors, ComponentLink1Description=http://www.murata.com/~/media/webrenewal/support/library/catalog/products/capacitor/mlcc/c02e.ashx, ComponentLink1URL=http://www.murata.com/~/media/webrenewal/support/library/catalog/products/capacitor/mlcc/c02e.ashx, Features=-, Height - Seated (Max)=-, Lead Spacing=-, Lead Style=-, Mounting Type="Surface Mount, MLCC", Packaging=Digi-Reel®, Part Status=Active, Pricing 1="1=0.2, 10=0.145, 100=0.0683, 500=0.04788, 1000=0.03964 (USD)", RoHS="RoHS Compliant", Size / Dimension="0.079\" L x 0.049\" W (2.00mm x 1.25mm)", Stock 1=891652, Supplier 1=Digi-Key, Thickness (Max)="0.053\" (1.35mm)"
J1: "FCS8 Socket Assembly, 20-Pins, w/ Alignment Pins", Manufacturer=Samtec, Manufacturer Part Number=FCS8-10-01-L-S-A-TR, Supplier Part Number 1=SAM14929CT-ND, ComponentLink1Description=http://cloud.samtec.com/catalog_english/fcs8.pdf?src-supplier=Avnet, ComponentLink1URL=http://cloud.samtec.com/catalog_english/fcs8.pdf?src-supplier=Avnet, Connector Type=Receptacle, Contact Plating=Gold, CREATED="31 NOV 2013 - WENDY XIN", Features=Shielded, Mount="Surface Mount", Number of Positions=10, Packaging="Tape and Reel", Pricing 1="1=4.29000, 10=4.11800, 25=3.77520, 50=3.60360, 100=3.43200 (USD)", RoHS=Yes, Stock 1=500, Supplier 1=Digi-Key, Termination=Solder
R1 R4 R10 R43 R45: library part CMP-1011-00940-1, "10k 0.063W 1% 0402 (1005 Metric)  SMD", Case/Package=0402, Case Code (Metric)=1005, Manufacturer=Panasonic, Manufacturer Part Number=ERJ-2RKF1002X, Max Operating Temperature=155°C, Max Power Dissipation=100mW, Min Operating Temperature=-55°C, Package Quantity=1, Resistance=10kR, Supplier Part Number 1=P10.0KLDKR-ND, Temperature Coefficient=100ppm/°C, Tolerance=1%, Voltage Rating=50V, Case Code (Imperial)=0402, ComponentLink1Description=https://datasheet.ciiva.com/11821/0900766b80f80784-11821171.pdf?src-supplier=RSComponents, ComponentLink1URL=https://datasheet.ciiva.com/11821/0900766b80f80784-11821171.pdf?src-supplier=RSComponents, ComponentLink2Description=https://datasheet.ciiva.com/16199/aoa0000ce2-16199478.pdf?src-supplier=Future+Electronics, ComponentLink2URL=https://datasheet.ciiva.com/16199/aoa0000ce2-16199478.pdf?src-supplier=Future+Electronics, ComponentLink3Description=https://datasheet.ciiva.com/17212/aoa0000ce2-17212102.pdf?src-supplier=Avnet+Europe, ComponentLink3URL=https://datasheet.ciiva.com/17212/aoa0000ce2-17212102.pdf?src-supplier=Avnet+Europe, ComponentLink4Description=https://datasheet.ciiva.com/24023/aoa0000ce2-24023017.pdf?src-supplier=Mouser, ComponentLink4URL=https://datasheet.ciiva.com/24023/aoa0000ce2-24023017.pdf?src-supplier=Mouser, ComponentLink5Description=https://datasheet.ciiva.com/28514/1678782-28514185.pdf?src-supplier=Element14, ComponentLink5URL=https://datasheet.ciiva.com/28514/1678782-28514185.pdf?src-supplier=Element14, ComponentLink6Description=https://datasheet.ciiva.com/43467/1678782-43467402.pdf?src-supplier=Farnell, ComponentLink6URL=https://datasheet.ciiva.com/43467/1678782-43467402.pdf?src-supplier=Farnell, ComponentLink7Description=https://datasheet.ciiva.com/27055/1987020-27055643.pdf?src-supplier=Jameco, ComponentLink7URL=https://datasheet.ciiva.com/27055/1987020-27055643.pdf?src-supplier=Jameco, ComponentLink8Description=https://datasheet.ciiva.com/48531/aoa0000ce2-48531069.pdf?src-supplier=Avnet, ComponentLink8URL=https://datasheet.ciiva.com/48531/aoa0000ce2-48531069.pdf?src-supplier=Avnet, ComponentLink9Description=https://datasheet.ciiva.com/9194/aoa0000ce2-9194142.pdf?src-supplier=Avnet, ComponentLink9URL=https://datasheet.ciiva.com/9194/aoa0000ce2-9194142.pdf?src-supplier=Avnet, ComponentLink10Description=https://datasheet.ciiva.com/16782/70260748-16782590.pdf?src-supplier=Allied+Electronics, ComponentLink10URL=https://datasheet.ciiva.com/16782/70260748-16782590.pdf?src-supplier=Allied+Electronics, ComponentLink11Description=https://datasheet.ciiva.com/16786/70260748-16786734.pdf?src-supplier=Allied+Electronics, ComponentLink11URL=https://datasheet.ciiva.com/16786/70260748-16786734.pdf?src-supplier=Allied+Electronics, ComponentLink12Description=https://datasheet.ciiva.com/30201/aoa0000ce2-30201022.pdf?src-supplier=Onlinecomponents.com, ComponentLink12URL=https://datasheet.ciiva.com/30201/aoa0000ce2-30201022.pdf?src-supplier=Onlinecomponents.com, Composition="Thick Film", Contact Plating=Tin, Depth=0.5mm, Features="Automotive AEC-Q200", Height=0.35mm, Lead Free="Lead Free", Length=1mm, Military Standard=Not, Mount="Surface Mount", Number of Pins=2, Number of Terminations=2, Packaging="Tape and Reel", Power Rating=100mW, Pricing 1="1=0.10000, 10=0.04500, 100=0.01830, 1000=0.00823, 2500=0.00715, 5000=0.00590 (USD)", Radiation Hardening=No, REACH SVHC="No SVHC", RoHS=Yes, Stock 1=12501303, Supplier 1=Digi-Key, Termination=SMD/SMT, Voltage Rating (DC)=50V, Width=0.02inch
R2 R6 R11 R16 R19 R21 R24 R44: library part CMP-1011-00940-1, "100k 0.063W 1% 0402 (1005 Metric)  SMD", Case/Package=0402, Case Code (Metric)=1005, Manufacturer=Panasonic, Manufacturer Part Number=ERJ-2RKF1003X, Max Operating Temperature=155°C, Max Power Dissipation=100mW, Min Operating Temperature=-55°C, Package Quantity=1, Resistance=100kR, Supplier Part Number 1=P100KLCT-ND, Temperature Coefficient=100ppm/°C, Tolerance=1%, Voltage Rating=50V, Case Code (Imperial)=0402, ComponentLink1Description=https://datasheet.ciiva.com/11821/0900766b80f80784-11821175.pdf?src-supplier=RSComponents, ComponentLink1URL=https://datasheet.ciiva.com/11821/0900766b80f80784-11821175.pdf?src-supplier=RSComponents, ComponentLink2Description=https://datasheet.ciiva.com/34303/1987038-34303550.pdf?src-supplier=Jameco, ComponentLink2URL=https://datasheet.ciiva.com/34303/1987038-34303550.pdf?src-supplier=Jameco, ComponentLink3Description=https://datasheet.ciiva.com/7830/aoa0000ce2-7830725.pdf?src-supplier=Element14, ComponentLink3URL=https://datasheet.ciiva.com/7830/aoa0000ce2-7830725.pdf?src-supplier=Element14, ComponentLink4Description=https://datasheet.ciiva.com/16522/aoa0000ce2-16522647.pdf?src-supplier=Avnet+Asia, ComponentLink4URL=https://datasheet.ciiva.com/16522/aoa0000ce2-16522647.pdf?src-supplier=Avnet+Asia, ComponentLink5Description=https://datasheet.ciiva.com/16778/70260748-16778055.pdf?src-supplier=Allied+Electronics, ComponentLink5URL=https://datasheet.ciiva.com/16778/70260748-16778055.pdf?src-supplier=Allied+Electronics, ComponentLink6Description=https://datasheet.ciiva.com/43467/1678782-43467480.pdf?src-supplier=Farnell, ComponentLink6URL=https://datasheet.ciiva.com/43467/1678782-43467480.pdf?src-supplier=Farnell, ComponentLink7Description=https://datasheet.ciiva.com/16440/aoa0000ce2-16440217.pdf?src-supplier=Future+Electronics, ComponentLink7URL=https://datasheet.ciiva.com/16440/aoa0000ce2-16440217.pdf?src-supplier=Future+Electronics, ComponentLink8Description=https://datasheet.ciiva.com/30245/aoa0000ce2-30245691.pdf?src-supplier=Onlinecomponents.com, ComponentLink8URL=https://datasheet.ciiva.com/30245/aoa0000ce2-30245691.pdf?src-supplier=Onlinecomponents.com, ComponentLink9Description=https://datasheet.ciiva.com/7830/426256-7830974.pdf?src-supplier=Element14, ComponentLink9URL=https://datasheet.ciiva.com/7830/426256-7830974.pdf?src-supplier=Element14, ComponentLink10Description=https://datasheet.ciiva.com/16784/70260748-16784190.pdf?src-supplier=Allied+Electronics, ComponentLink10URL=https://datasheet.ciiva.com/16784/70260748-16784190.pdf?src-supplier=Allied+Electronics, ComponentLink11Description=https://datasheet.ciiva.com/22723/426256-22723902.pdf?src-supplier=Element14, ComponentLink11URL=https://datasheet.ciiva.com/22723/426256-22723902.pdf?src-supplier=Element14, ComponentLink12Description=https://datasheet.ciiva.com/48531/aoa0000ce2-48531070.pdf?src-supplier=Avnet, ComponentLink12URL=https://datasheet.ciiva.com/48531/aoa0000ce2-48531070.pdf?src-supplier=Avnet, ComponentLink13Description=https://datasheet.ciiva.com/9186/aoa0000ce2-9186687.pdf?src-supplier=Avnet, ComponentLink13URL=https://datasheet.ciiva.com/9186/aoa0000ce2-9186687.pdf?src-supplier=Avnet, Composition="Thick Film", Contact Plating=Tin, Depth=0.5mm, Features="Automotive AEC-Q200", Height=0.35mm, Lead Free="Lead Free", Length=1mm, Military Standard=Not, Mount="Surface Mount", Number of Pins=2, Number of Terminations=2, Packaging="Tape and Reel", Power Rating=100mW, Pricing 1="1=0.10000, 10=0.04500, 100=0.01830, 1000=0.00823, 2500=0.00715, 5000=0.00590 (USD)", Radiation Hardening=No, REACH SVHC="No SVHC", RoHS=Yes, Stock 1=9533476, Supplier 1=Digi-Key, Termination=SMD/SMT, Voltage Rating (DC)=50V, Width=0.5mm
R3 R7 R9: library part CMP-1011-00940-1, "6M34 0.063W 1% 0402 (1005 Metric)  SMD", Case/Package=0402, Case Code (Metric)=1005, Manufacturer=Panasonic, Manufacturer Part Number=ERJ-2RKF1000X, Max Operating Temperature=155°C, Max Power Dissipation=100mW, Min Operating Temperature=-55°C, Package Quantity=1, Resistance=100R, Supplier Part Number 1=P100LCT-ND, Temperature Coefficient=100ppm/°C, Tolerance=1%, Voltage Rating=50V, Case Code (Imperial)=0402, Composition="Thick Film", Contact Plating=Tin, Depth=0.5mm, Features="Automotive AEC-Q200", Height=0.35mm, Lead Free="Lead Free", Length=1mm, Military Standard=Not, Mount="Surface Mount", Number of Pins=2, Number of Terminations=2, Packaging="Tape and Reel", Power Rating=100mW, Pricing 1="1=0.10000, 10=0.04500, 100=0.01830, 1000=0.00823, 2500=0.00715, 5000=0.00590 (USD)", Radiation Hardening=No, REACH SVHC="No SVHC", RoHS=Yes, Stock 1=6071624, Supplier 1=Digi-Key, Termination=SMD/SMT, Voltage Rating (DC)=50V, Width=0.5mm
R5 R15 R17 R18 R20 R22 R23 R25 R26 R27 R28 R29 R30 R32 R33 R34 R35 R36 R37 R38 R39 R40 R41: library part CMP-1013-00215-1, "2R55 0.125W 1% 0805 (2012 Metric)  SMD", Case-EIA=0805, Case-Metric=2012, Power="0.125 W", Tolerance="1 %", Technology=SMT
R8: library part CMP-1011-00463-1, "RES SMD 301K OHM 1% 1/10W 0402", Case/Package=0402, Case Code (Metric)=1005, Manufacturer=Panasonic, Manufacturer Part Number=ERJ-2RKF3013X, Max Operating Temperature=155°C, Max Power Dissipation=100mW, Min Operating Temperature=-55°C, Package Quantity=1, Resistance=301kR, Supplier Part Number 1=P301KLCT-ND, Temperature Coefficient=100ppm/°C, Tolerance=1%, Voltage Rating=50V, Case Code (Imperial)=0402, ComponentLink1Description=https://datasheet.ciiva.com/28531/1678782-28531429.pdf?src-supplier=Element14, ComponentLink1URL=https://datasheet.ciiva.com/28531/1678782-28531429.pdf?src-supplier=Element14, ComponentLink2Description=https://datasheet.ciiva.com/16780/70260748-16780326.pdf?src-supplier=Allied+Electronics, ComponentLink2URL=https://datasheet.ciiva.com/16780/70260748-16780326.pdf?src-supplier=Allied+Electronics, ComponentLink3Description=https://datasheet.ciiva.com/30260/aoa0000ce2-30260647.pdf?src-supplier=Onlinecomponents.com, ComponentLink3URL=https://datasheet.ciiva.com/30260/aoa0000ce2-30260647.pdf?src-supplier=Onlinecomponents.com, ComponentLink4Description=https://datasheet.ciiva.com/28683/1678782-28683161.pdf?src-supplier=Element14, ComponentLink4URL=https://datasheet.ciiva.com/28683/1678782-28683161.pdf?src-supplier=Element14, ComponentLink5Description=https://datasheet.ciiva.com/16771/70260748-16771500.pdf?src-supplier=Allied+Electronics, ComponentLink5URL=https://datasheet.ciiva.com/16771/70260748-16771500.pdf?src-supplier=Allied+Electronics, ComponentLink6Description=https://datasheet.ciiva.com/24161/aoa0000ce2-24161740.pdf?src-supplier=Mouser, ComponentLink6URL=https://datasheet.ciiva.com/24161/aoa0000ce2-24161740.pdf?src-supplier=Mouser, ComponentLink7Description=https://datasheet.ciiva.com/46388/426256-46388702.pdf?src-supplier=Element14, ComponentLink7URL=https://datasheet.ciiva.com/46388/426256-46388702.pdf?src-supplier=Element14, ComponentLink8Description=https://datasheet.ciiva.com/9183/aoa0000ce2-9183247.pdf?src-supplier=Avnet, ComponentLink8URL=https://datasheet.ciiva.com/9183/aoa0000ce2-9183247.pdf?src-supplier=Avnet, Composition="Thick Film", Contact Plating=Tin, Depth=0.5mm, Features="Automotive AEC-Q200", Height=0.016inch, Lead Free="Lead Free", Length=1mm, Military Standard=Not, Mount="Surface Mount", Number of Terminations=2, Packaging="Tape and Reel", Power Rating=100mW, Pricing 1="1=0.10000, 10=0.04500, 100=0.01830, 1000=0.00823, 2500=0.00715, 5000=0.00590 (USD)", REACH SVHC=Unknown, RoHS=Yes, Stock 1=413342, Supplier 1=Digi-Key, Termination=SMD/SMT, Voltage Rating (DC)=50V, Weight=2.8E-05oz, Width=0.02inch
R12: library part CMP-1011-00463-1, "RESISTOR, 0402, 47K5 1%, 0.1W", Case/Package=0402, Case Code (Metric)=1005, Manufacturer=Panasonic, Manufacturer Part Number=ERJ-2RKF4752X, Max Operating Temperature=155°C, Max Power Dissipation=100mW, Min Operating Temperature=-55°C, Package Quantity=1, Resistance=47.5kR, Supplier Part Number 1=P47.5KLCT-ND, Temperature Coefficient=100ppm/°C, Tolerance=1%, Voltage Rating=50V, Case Code (Imperial)=0402, ComponentLink1Description=https://datasheet.ciiva.com/16786/70260748-16786261.pdf?src-supplier=Allied+Electronics, ComponentLink1URL=https://datasheet.ciiva.com/16786/70260748-16786261.pdf?src-supplier=Allied+Electronics, ComponentLink2Description=https://datasheet.ciiva.com/5969/426256-5969222.pdf?src-supplier=Farnell, ComponentLink2URL=https://datasheet.ciiva.com/5969/426256-5969222.pdf?src-supplier=Farnell, ComponentLink3Description=https://datasheet.ciiva.com/16759/70260748-16759480.pdf?src-supplier=Allied+Electronics, ComponentLink3URL=https://datasheet.ciiva.com/16759/70260748-16759480.pdf?src-supplier=Allied+Electronics, ComponentLink4Description=https://datasheet.ciiva.com/43460/426256-43460330.pdf?src-supplier=Farnell, ComponentLink4URL=https://datasheet.ciiva.com/43460/426256-43460330.pdf?src-supplier=Farnell, ComponentLink5Description=https://datasheet.ciiva.com/30225/aoa0000ce2-30225053.pdf?src-supplier=Onlinecomponents.com, ComponentLink5URL=https://datasheet.ciiva.com/30225/aoa0000ce2-30225053.pdf?src-supplier=Onlinecomponents.com, ComponentLink6Description=https://datasheet.ciiva.com/46377/426256-46377551.pdf?src-supplier=Element14, ComponentLink6URL=https://datasheet.ciiva.com/46377/426256-46377551.pdf?src-supplier=Element14, Composition="Thick Film", Contact Plating=Tin, Depth=0.5mm, Features="Automotive AEC-Q200", Height=0.35mm, Lead Free="Lead Free", Length=1mm, Military Standard=Not, Mount="Surface Mount", Number of Terminations=2, Packaging="Tape and Reel", Power Rating=100mW, Pricing 1="1=0.10000, 10=0.04500, 100=0.01830, 1000=0.00823, 2500=0.00715, 5000=0.00590 (USD)", REACH SVHC="No SVHC", RoHS=Yes, Stock 1=774075, Supplier 1=Digi-Key, Termination=SMD/SMT, Voltage Rating (DC)=50V, Width=0.02inch
R13: library part CMP-1011-00463-1, "Panasonic ERJ2RK Series Precision Thick Film Surface Mount Resistor 0402 Case 475k 1% 0.1W 100ppm/C", Case/Package=0402, Case Code (Metric)=1005, Manufacturer=Panasonic, Manufacturer Part Number=ERJ-2RKF4753X, Max Operating Temperature=155°C, Max Power Dissipation=100mW, Min Operating Temperature=-55°C, Package Quantity=10000, Resistance=475kR, Supplier Part Number 1=P475KLCT-ND, Temperature Coefficient=100ppm/°C, Tolerance=1%, Voltage Rating=50V, Case Code (Imperial)=0402, ComponentLink1Description=https://datasheet.ciiva.com/7942/aoa0000ce2-7942357.pdf?src-supplier=Element14, ComponentLink1URL=https://datasheet.ciiva.com/7942/aoa0000ce2-7942357.pdf?src-supplier=Element14, ComponentLink2Description=https://datasheet.ciiva.com/46373/1678782-46373126.pdf?src-supplier=Element14, ComponentLink2URL=https://datasheet.ciiva.com/46373/1678782-46373126.pdf?src-supplier=Element14, ComponentLink3Description=https://datasheet.ciiva.com/9181/aoa0000ce2-9181671.pdf?src-supplier=Avnet, ComponentLink3URL=https://datasheet.ciiva.com/9181/aoa0000ce2-9181671.pdf?src-supplier=Avnet, ComponentLink4Description=https://datasheet.ciiva.com/22721/1678782-22721543.pdf?src-supplier=Farnell, ComponentLink4URL=https://datasheet.ciiva.com/22721/1678782-22721543.pdf?src-supplier=Farnell, ComponentLink5Description=https://datasheet.ciiva.com/46373/1678782-46373127.pdf?src-supplier=Element14, ComponentLink5URL=https://datasheet.ciiva.com/46373/1678782-46373127.pdf?src-supplier=Element14, ComponentLink6Description=https://datasheet.ciiva.com/43467/1678782-43467546.pdf?src-supplier=Farnell, ComponentLink6URL=https://datasheet.ciiva.com/43467/1678782-43467546.pdf?src-supplier=Farnell, ComponentLink7Description=https://datasheet.ciiva.com/16759/70260748-16759533.pdf?src-supplier=Allied+Electronics, ComponentLink7URL=https://datasheet.ciiva.com/16759/70260748-16759533.pdf?src-supplier=Allied+Electronics, Composition="Thick Film", Contact Plating=Tin, Depth=0.5mm, Height=0.35mm, Lead Free="Lead Free", Length=1mm, Military Standard=Not, Mount="Surface Mount", Number of Terminations=2, Packaging="Tape and Reel", Power Rating=100mW, Pricing 1="1=0.10000, 10=0.04500, 100=0.01830, 1000=0.00823, 2500=0.00715, 5000=0.00590 (USD)", REACH SVHC=Yes, RoHS=Yes, Stock 1=105093, Supplier 1=Digi-Key, Termination=SMD/SMT, Voltage Rating (DC)=50V, Width=0.02inch
R14: library part CMP-1011-00463-1, "RESISTOR, 0402 2M2 1%, REEL 10000", Case/Package=0402, Case Code (Metric)=1005, Manufacturer=Yageo, Manufacturer Part Number=RC0402FR-072M2L, Max Operating Temperature=155°C, Max Power Dissipation=63mW, Min Operating Temperature=-55°C, Resistance=2.2MR, Supplier Part Number 1=RC0402FR-072M2L-REEL, Temperature Coefficient=100ppm/°C, Tolerance=1%, Voltage Rating=50V, Case Code (Imperial)=0402, ComponentLink1Description=https://datasheet.ciiva.com/6168/1686128-6168958.pdf?src-supplier=Farnell, ComponentLink1URL=https://datasheet.ciiva.com/6168/1686128-6168958.pdf?src-supplier=Farnell, Composition="Thick Film", Depth=0.5mm, Features="Moisture Resistant", Height=0.016inch, Lead Free="Lead Free", Length=1mm, Military Standard=Not, Number of Pins=2, Number of Terminations=2, Packaging="Tape and Reel", Power Rating=63mW, Pricing 1="10000=0.00100, 50000=0.00080, 200000=0.00080, 400000=0.00080, 1000000=0.00070 (USD)", REACH SVHC=Unknown, RoHS=Yes, Stock 1=170000, Supplier 1="Future Electronics", Termination=SMD/SMT, Voltage Rating (DC)=50V, Width=0.5mm
R31: library part Trimmer, Manufacturer="Vishay Foil Resistors (Division of Vishay Precision Group)", Manufacturer Part Number=Y00535K00000J0L, Power (Watts)="0.25W, 1/4W", Resistance (Ohms)=5k, Resistive Material="Metal Foil", Supplier Part Number 1=804-1020-ND, Temperature Coefficient=±10ppm/°C, Tolerance=±5%, Adjustment Type="Side Adjustment", Category="Potentiometers, Variable Resistors", ComponentLink1Description=http://www.vishaypg.com/docs/63053/1240.pdf, ComponentLink1URL=http://www.vishaypg.com/docs/63053/1240.pdf, Mounting Type="Through Hole", Number of Turns=21, Packaging=Bulk, Part Status=Active, Pricing 1="1=34.42, 10=32.265, 25=26.5292, 50=22.944, 100=22.227, 250=20.793, 500=19.2156 (USD)", RoHS="RoHS Compliant", Size / Dimension="Rectangular - 0.250\" x 0.175\" Face x 0.250\" L (6.35mm x 4.45mm x 6.35mm)", Stock 1=679, Supplier 1=Digi-Key, Termination Style="PC Pins"
R42: library part CMP-1013-00215-1, "10k 0.125W 1% 0805 (2012 Metric)  SMD", Case-EIA=0805, Case-Metric=2012, Power="0.125 W", Tolerance="1 %", Technology=SMT
TP2: library part CMP-1672-00009-1, "Test Point, Orange, 1-Pin THD, RoHS", Forward Current="3 A", Forward Voltage="1.08 V", Max Operating Temperature="150 degC", Max Surge Current="80 A", Min Operating Temperature="-65 degC", Package Quantity=500, Peak Reverse Current="600 uA", ComponentLink1Description="Manufacturer URL", ComponentLink1URL=http://www.keyelco.com/, ComponentLink2Description=Datasheet, ComponentLink2URL=http://keyelco.com/userAssets/file/M65p56.pdf, DatasheetVersion=Jun-15, Diameter="5.3 mm", Height="0.25 inch", Length="9.5 mm", Mount="Through Hole", PackageDescription="1-Pin Through Hole Device, Dia 2.54 mm", PackageReference=5003, Packaging=Bulk, Pins=2, Radiation Hardening=No, REACH SVHC="No SVHC", RoHSCompliant=true, Weight="0.01 lb", Width="0.25 inch"